# Altium PCB version2.PcbDoc
Units mm, origin at the board's own origin, x right, y up, seen from the top; angles counter-clockwise.
Board outline 190.12 x 116.2 mm, 2 copper layers (Top Layer, Bottom Layer); 69 components, 36 nets, 150 pads, 1 vias.
Unrouted connection lines stored in the file: 1.
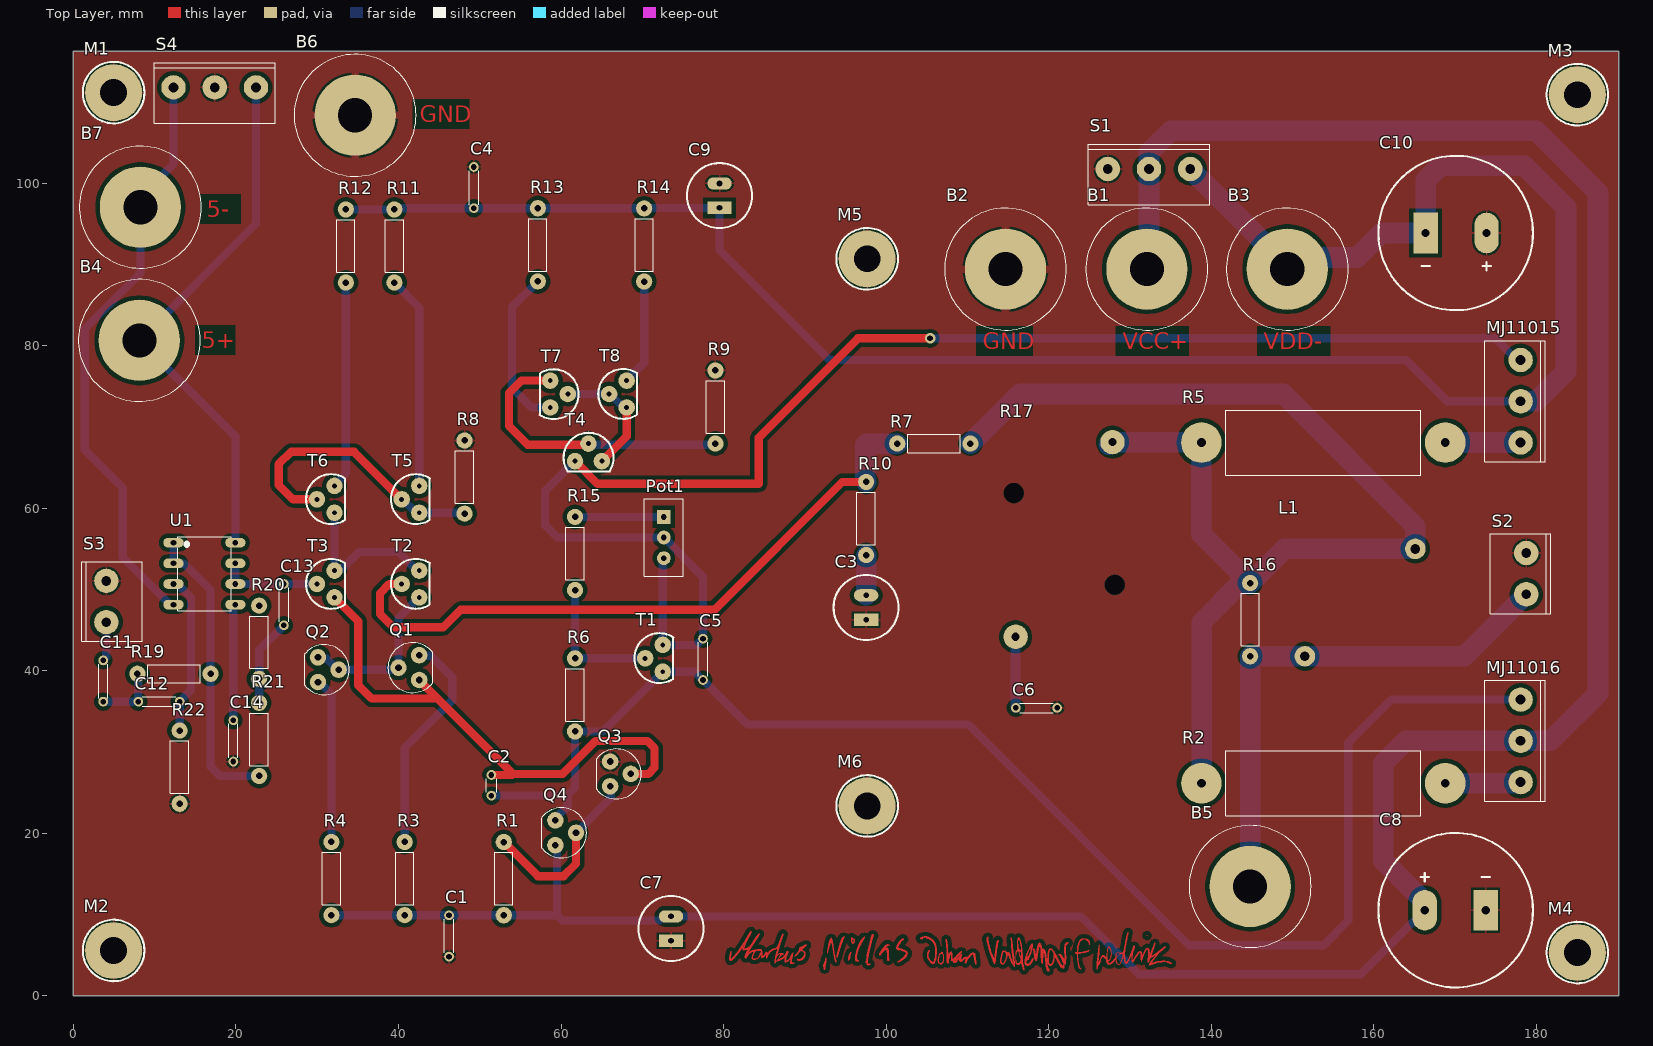
[diagram p0: Top Layer view]
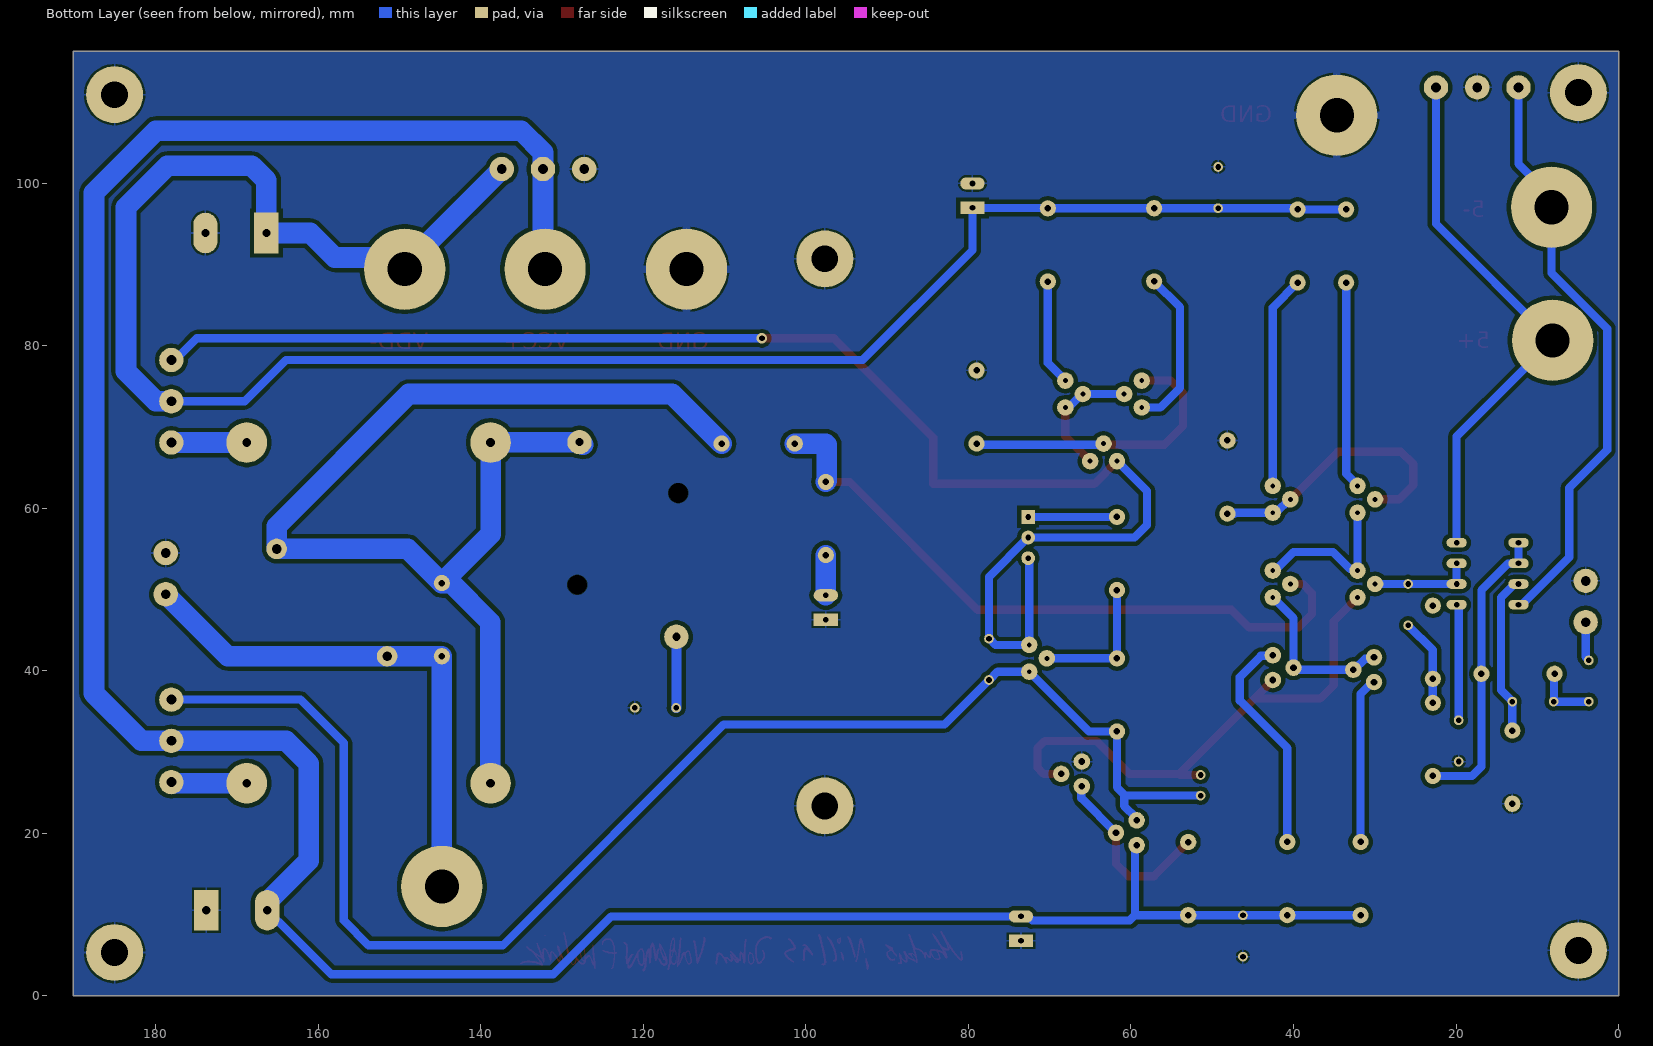
[diagram p1: Bottom Layer view, seen from below]
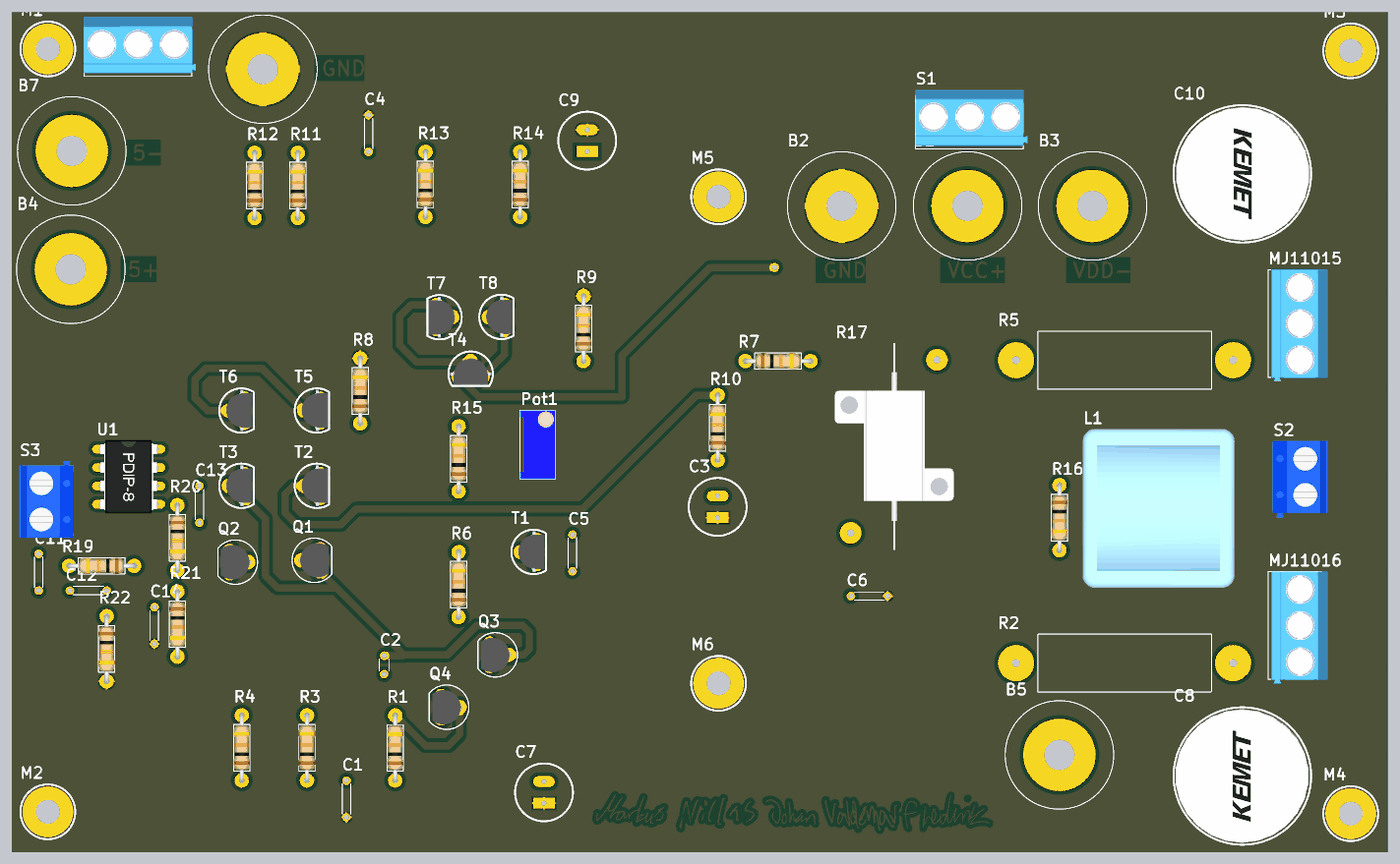
[diagram p2: 3D render of the assembled board from above, using the file's embedded part models]

## Layer stack, top to bottom
Top Solder: solder mask 0.0102, Solder Resist, Dk 3.5
Top Layer: signal copper 0.0356
Dielectric 1: dielectric 0.32, FR-4, Dk 4.8
Bottom Layer: signal copper 0.0356
Bottom Solder: solder mask 0.0102, Solder Resist, Dk 3.5

## Board outline
0,0 190.119,0 190.119,116.205 0,116.205

## Design rules (kind name [scope] priority, off if disabled: settings)
Clearance [All] p1: gap=0.508 ignorepadtopadclearanceinfootprint=TRUE except(0: Arc-Hole Track-Hole SMDPad-Hole THPad-Hole Via-Hole Fill-Hole Poly-Hole Region-Hole Text-Hole; 0.254: Arc-THPad Track-THPad SMDPad-THPad THPad-THPad)
PolygonConnect [All] p1: connectstyle=Relief reliefconductorwidth=0.254 reliefentries=4 polygonreliefangle="90 Angle" airgapwidth=0.254
RoutingVias [All] p1: holewidth=0.711 width=1.27 viastyle="Through Hole" minholewidth=0.711 minwidth=1.27 maxholewidth=0.711 maxwidth=1.27
SolderMaskExpansion [All] p1: expansion=0.102 istentingtop=FALSE
Width [All] p1: maxlimit=2.54 minlimit=1.016 preferedwidth=1.016 minimp=50.000000 maximp=50.000000 favimp=50.000000
30 further rules are at their usual default settings.

## Components (designator, comment, footprint, x,y, rotation, side; value= is the part's Value field where it differs from the comment)
B1 "Banana Plug" "Banana Plug On top" 132.08,89.408 r0 top
B2 "Banana Plug" "Banana Plug On top" 114.681,89.408 r0 top
B3 "Banana Plug" "Banana Plug On top" 149.352,89.408 r0 top
B4 "Banana Plug" "Banana Plug On top" 8.128,80.645 r0 top
B5 "Banana Plug" "Banana Plug On top" 144.78,13.462 r0 top
B6 "Banana Plug" "Banana Plug On top" 34.671,108.331 r0 top
B7 "Banana Plug" "Banana Plug On top" 8.255,97.028 r0 top
C1 "Cap" Cap-1 46.228,4.826 r90 top
C2 "Cap" Cap-0 51.435,27.178 r270 top
C3 "Cap" "Cap Ø8" 97.536,46.276 r90 top
C4 "Cap" Cap-1 49.276,96.901 r90 top
C5 "Cap" Cap-1 77.47,43.942 r270 top
C6 "Cap" Cap-1 121.031,35.433 r180 top
C7 "Cap" "Cap Ø8" 73.533,6.779 r90 top
C8 "Cap" "Cap Lyt Ø18" 166.263,10.541 r0 top
C9 "Cap" "Cap Ø8" 79.502,96.949 r90 top
C10 "Cap" "Cap Lyt Ø18" 173.863,93.853 r180 top
C11 "Cap" Cap-1 3.683,36.195 r90 top
C12 "Cap" Cap-1 13.081,36.195 r180 top
C13 "Cap" Cap-1 25.908,50.673 r270 top
C14 "Cap" Cap-1 19.685,33.909 r270 top
L1 "5 uH Homemade" "homecooked inductor" 158.369,48.387 r0 top
M1 "Screw Hole" "M3 Hole" 4.953,111.125 r0 top
M2 "Screw Hole" "M3 Hole" 4.953,5.588 r0 top
M3 "Screw Hole" "M3 Hole" 185.039,110.871 r0 top
M4 "Screw Hole" "M3 Hole" 185.039,5.334 r0 top
M5 "Screw Hole" "M3 Hole" 97.663,90.678 r0 top
M6 "Screw Hole" "M3 Hole" 97.663,23.368 r0 top
MJ11015 "Screw 3" Screw-3 178.054,68.077 r90 top
MJ11016 "Screw 3" Screw-3 178.054,26.299 r90 top
Pot1 "Pot Trim" "Pot trim slim high" 72.644,56.388 r270 top
Q1 "BC557" SOT54A 41.783,40.386 r90 top
Q2 "BC557" SOT54A 30.862,40.132 r270 top
Q3 "BC557" SOT54A 66.802,27.305 r270 top
Q4 "BC557" SOT54A 60.071,20.066 r270 top
R1 "Resistor" "RES THT 9mm" 52.959,18.923 r270 top
R2 "Resistor" "RES THT 30mm" 138.783,26.162 r0 top
R3 "Resistor" "RES THT 9mm" 40.767,18.933 r270 top
R4 "Resistor" "RES THT 9mm" 31.75,18.933 r270 top
R5 "Resistor" "RES THT 30mm" 168.783,68.072 r180 top
R6 "Resistor" "RES THT 9mm" 61.722,41.529 r270 top
R7 "Resistor" "RES THT 9mm" 110.363,67.945 r180 top
R8 "Resistor" "RES THT 9mm" 48.133,68.326 r270 top
R9 "Resistor" "RES THT 9mm" 78.994,76.945 r270 top
R10 "Resistor" "RES THT 9mm" 97.536,63.229 r270 top
R11 "Resistor" "RES THT 9mm" 39.497,96.757 r270 top
R12 "Resistor" "RES THT 9mm" 33.528,96.757 r270 top
R13 "Resistor" "RES THT 9mm" 57.15,96.901 r270 top
R14 "Resistor" "RES THT 9mm" 70.231,96.884 r270 top
R15 "Resistor" "RES THT 9mm" 61.722,58.928 r270 top
R16 "Resistor" "RES THT 9mm" 144.78,41.783 r90 top
R17 "Resistor" "Power RES 5 watt" 121.547,56.099 r90 top
R19 "Resistor" "RES THT 9mm" 7.891,39.624 r0 top
R20 "Resistor" "RES THT 9mm" 22.86,39.006 r90 top
R21 "Resistor" "RES THT 9mm" 22.86,27.051 r90 top
R22 "Resistor" "RES THT 9mm" 13.081,23.639 r90 top
S1 "Screw 3" Screw-3 137.414,101.727 r180 top
S2 "Screw 2" Screw-2 178.754,49.408 r90 top
S3 "Screw 2" Screw-2 4.064,51.054 r270 top
S4 "Screw 3" Screw-3 22.474,111.76 r180 top
T1 "BC547" TO92 72.136,40.259 r90 top
T2 "BC547" TO92 42.176,49.403 r90 top
T3 "BC547" TO92 31.75,49.403 r90 top
T4 "BC547" TO92 62.103,66.167 r0 top
T5 "BC547" TO92 42.176,59.817 r90 top
T6 "BC547" TO92 31.75,59.817 r90 top
T7 "BC547" TO92 59.055,75.311 r270 top
T8 "BC547" TO92 67.691,72.771 r90 top
U1 "TLC272" DIP-8 12.319,55.753 r270 top

## Footprints (in the part's own frame and the unit in brackets; to place one, negate y for a bottom-side part, rotate by r counter-clockwise, add the part's x,y. Pads: shape width x height; smd on the part's side, far side on the other; paste and mask are expansions set on the pad)
"Banana Plug On top" [mm] "Banana Plug"
  round 10 hole 4.2: 1(0,0)
  silkscreen extent -7.5,-7.5 7.5,7.5
"Cap Lyt Ø18" [mm] "Capacitor"
  oval 3x5 hole 1: 1(0,0)
  rect 3x5 hole 1: 2(7.5,0)
  silkscreen extent -5.7,-9.5 13.3,9.5, body extent -5.5,-9.25 13,9.25, height 38
"Cap Ø8" [mm] "Capacitor"
  rect 1.5x3 hole 0.7: 1(0,0)
  oval 1.5x3 hole 0.7: 2(3,0)
  silkscreen extent -2.5,-4 5.5,4
Cap-0 [mm] "Capacitor with no space"
  round 1.2 hole 0.7: 1(0,0) 2(2.54,0)
  silkscreen extent 0.45,-0.65 2.1,0.65
Cap-1 [mm] "Capacitor with 1 space"
  round 1.2 hole 0.7: 1(0,0) 2(5.08,0)
  silkscreen extent 0.45,-0.58 4.62,0.58
DIP-8 [mm] "Dual Inline Package with 8 Leads"
  oval 1.2x2.5 hole 0.7: 1(0,0) 2(2.54,0) 3(5.08,0) 4(7.62,0) 5(7.62,7.62) 6(5.08,7.62) 7(2.54,7.62) 8(0,7.62)
  silkscreen extent -0.75,0.53 8.35,7.13, body extent -1.28,-0.13 8.88,7.74, height 5.31
"homecooked inductor" [mil]
  round 100 hole 47.24: 1(265,260) 2(-270,-260)
  body extent -409,-465 418,401, height 625
"M3 Hole" [mm]
  round 7 hole 3.3 mask+0: 1(0,0)
  silkscreen extent -3.78,-3.78 3.79,3.78
"Pot trim slim high" [mm]
  rect 1.7x1.7 hole 0.71: 1(-2.54,0)
  round 1.7 hole 0.71: 2(0,0) 3(2.54,0)
  silkscreen extent -4.76,-2.41 4.76,2.42, body extent -4.76,-2.41 4.76,2.42, height 11.55
"Power RES 5 watt" [mm]
  round 3 hole 1: 1(-11.925,5.625) 2(12.025,-6.3)
  round 0 hole 2.45: case1(-5.525,-6.575) case2(5.75,5.85)
  body extent -14.25,-8.6 14.33,7.81, height 8.13
"RES THT 9mm" [mm]
  round 2 hole 0.8: 1(0,0) 2(9,0)
  silkscreen extent 1.28,-1.12 7.73,1.12, body extent -0.32,-1.13 9.28,1.14, height 2.36
"RES THT 30mm" [mm] "Typically power resistor"
  round 5 hole 1.1: 1(0,0) 2(30,0)
  silkscreen extent 3,-4 27,4
Screw-2 [mm] "Screw Terminal with 2 connections"
  round 3 hole 1.2: 1(0,0) 2(5.075,0)
  silkscreen extent -2.37,-3.03 7.45,4.43, body extent -3.07,-3.1 7.53,4.5, height 10
Screw-3 [mm] "Screw Terminal with 3 connections"
  round 3 hole 1.2: 1(0,0) 2(5.075,0) 3(10.15,0)
  silkscreen extent -2.37,-3.03 12.52,4.43, body extent -2.95,-3.8 12.55,4, height 10.3
SOT54A [mil]
  round 80 hole 32: B(0,70) C(-60,-30) E(60,-30)
  silkscreen extent -121,-96 121,121, body extent -94,-77 95,77, height 305
TO92 [mil]
  round 80 hole 24: 1(-15,-15) 2(50,70) 3(115,-15)
  silkscreen extent -70,-66 172,122, body extent -60,-58 163,85, height 345

## Part data
C1 C4: library part "Capacitor 1 space", Capacity=2,2nF
C2: library part "Capacitor 0 space", Capacity=220pF
C3 C7 C9: library part "Capacitor unpolarized", Capacity=100uF
C5: library part "Capacitor 1 space", Capacity=470nF
C6 C14: library part "Capacitor 1 space", Capacity=100nF
C8 C10: library part "Capacitor electrolytic", Capacity=4.7mF
C11 C12: library part "Capacitor 1 space", Capacity=22nF
C13: library part "Capacitor 1 space", Capacity=200nF
L1: library part "homemade inductor"
Pot1: "Potentiometer", Resistance=1k
Q1 Q2 Q3 Q4: "Bipolar (BJT) Transistor PNP 45 V 100 mA 320MHz 625 mW Through Hole TO-92 (TO-226)", Package="E-PKG AXIAL-LEADED-2 ON Semiconductor", Availability="In Stock", Check_prices=https://www.snapeda.com/parts/BC557/Onsemi/view-part/?ref=eda, MF=ON, MP=BC557, Price=None, SnapEDA_Link=https://www.snapeda.com/parts/BC557/Onsemi/view-part/?ref=snap
T1 T2 T3 T4 T5 T6 T7 T8: "Trans GP BJT NPN 45V 0.1A 500mW 3-Pin TO-92 T/R", Package=None, Check_prices=https://www.snapeda.com/parts/BC547/Onsemi/view-part/?ref=eda, MF="ON Semiconductor", MP=BC547, SnapEDA_Link=https://www.snapeda.com/parts/BC547/Onsemi/view-part/?ref=snap
U1: "PRECISION DUAL OPERATIONAL AMPLIFIER"
R1 R10: Ohm=1k
R2 R5: Ohm=0.4
R3 R4: Ohm=100
R6: Ohm=1K
R7: Ohm=13.82k
R8: Ohm=2k
R9: Ohm=3k
R11 R12: Ohm=5k
R13 R14: Ohm=200
R15: Ohm=220
R16 R17: Ohm=10
R19: Ohm=255k
R20 R21: Ohm=56
R22: Ohm=511k

## Via types
v1: diameter 1.27, hole 0.711, Top Layer to Bottom Layer, 1 vias

## Nets (pads, with @x,y where several pads share a name; then routed paths per layer and width w, separated by ;. In a path a pad name is that pad's centre, name@x,y a point inside that pad or via, vN(x,y) a via of type N, cw(c..) or ccw(c..) an arc to the next point about the centre after c; other vN are vias at no path point)
+5: B4.1 S4.1 U1.8 | length 66.8
  Bottom Layer w1.016: U1.8 19.939,68.834 B4.1 22.474,94.991 S4.1
-5: B7.1 S4.3 U1.4 | length 72.9
  Bottom Layer w1.016: U1.4 11.919,48.133 6.096,53.956 6.096,62.484 1.421,67.159 1.421,82.087 8.255,88.921 B7.1 8.255,98.298 12.324,102.367 S4.3
AB_out: B5.1 L1.2 R16.1 S2.1 | length 65.5
  Bottom Layer w2.54: B5.1 R16.1 L1.2 171.129,41.783 S2.1
DIFF_fb: R7.2 R10.1 T2.2 | length 82.4
  Top Layer w1.016: T2.2@40.525,50.673 38.862,50.673 37.719,49.53 37.719,46.99 39.37,45.339 45.466,45.339 47.625,47.498 78.867,47.498 94.598,63.229 R10.1
  Bottom Layer w1.016: 97.409,67.818 97.536,67.945
  Bottom Layer w2.54: 97.409,67.818 97.409,63.356 R10.1 ; 97.536,67.945 R7.2
GND: B2.1 B6.1 C1.1 C3.1 C4.2 C6.1 C7.1 C8.2 C9.2 C10.1 C14.2 M1.1 M2.1 M3.1 M4.1 M5.1 M6.1 Q3.C R8.1 R9.1 R22.1 S1.3 S2.2 S3.1 S4.2
NetC3_2: C3.2 R10.2 | length 5
  Bottom Layer w2.54: C3.2 R10.2
NetC6_2: C6.2 R17.1 | length 8.8
  Bottom Layer w1.27: R17.1 115.922,35.462 C6.2
NetC11_1: C11.1 C12.2 R19.1 | length 7.8
  Bottom Layer w1.016: C11.1 C12.2 7.966,36.23 7.966,39.549 R19.1
NetC11_2: C11.2 S3.2 | length 4.9
  Bottom Layer w1.016: C11.2 3.683,41.325 4.064,41.706 S3.2
NetC12_1: C12.1 R22.2 U1.3 | length 19.9
  Bottom Layer w1.016: U1.3 12.919,50.673 13.004,50.588 13.004,50.496 14.478,49.022 14.478,37.642 13.081,36.245 C12.1 R22.2
NetC13_1: C13.1 T3.2 U1.6 U1.7 | length 12.6
  Bottom Layer w1.016: U1.7 U1.6 C13.1 T3.2
NetC13_2: C13.2 R20.1 R21.2 | length 10.8
  Bottom Layer w1.016: R21.2 R20.1 22.86,42.545 C13.2
NetC14_1: C14.1 R20.2 U1.5 | length 14.3
  Bottom Layer w1.016: C14.1 19.685,47.829 19.939,48.083 U1.5
NetL1_1: L1.1 R2.1 R5.2 R7.1 R16.2 R17.2 | length 147.9
  Bottom Layer w2.54: R7.1 116.459,74.041 148.844,74.041 165.1,57.785 L1.1 148.988,54.991 R16.2 ; R17.2@127.417,67.818 127.723,68.124 R17.2 127.873,68.098 138.757,68.098 R5.2 138.783,56.78 R16.2 ; R2.1 138.811,26.19 138.811,45.974 143.62,50.783 R16.2
NetMJ11015_1: MJ11015.1 R5.1 | length 9.3
  Bottom Layer w2.54: R5.1 MJ11015.1@178.049,68.072
NetMJ11016_1: MJ11016.1 R2.2 | length 9.3
  Bottom Layer w2.54: R2.2 177.917,26.162 MJ11016.1
NetPot1_1: Pot1.1 R15.1 | length 10.9
  Bottom Layer w1.016: R15.1 Pot1.1
NetQ1_B: Q1.B Q2.B Q2.C T2.1 | length 20.2
  Bottom Layer w1.016: Q2.C@30.227,41.529 30.286,41.471 31.219,41.471 32.558,40.132 Q2.B 39.669,40.132 39.923,40.386 Q1.B 40.005,46.47 T2.1
NetQ1_E: Q1.E R3.1 | length 27.9
  Bottom Layer w1.016: R3.1 40.767,30.48 46.609,36.322 46.609,39.243 44.024,41.828 42.627,41.828 Q1.E
NetQ2_E: Q2.E R4.1 | length 20.4
  Bottom Layer w1.016: Q2.E@30.227,38.735 30.227,38.691 31.75,37.168 R4.1
NetQ3_E: Q3.E Q4.B R1.1 | length 22.7
  Top Layer w1.016: R1.1 57.15,14.732 60.325,14.732 61.849,16.256 Q4.B
  Bottom Layer w1.016: Q4.B 66.109,24.326 66.109,25.85 Q3.E@66.167,25.908
NetR6_1: R6.1 R15.2 T1.2 | length 17.2
  Bottom Layer w1.016: R15.2 R6.1 T1.2@70.485,41.529
NetR8_2: R8.2 T5.1 T5.2 T6.2 | length 33.7
  Top Layer w1.016: T6.2 27.051,61.087 25.273,62.865 25.273,65.405 26.797,66.929 34.556,66.929 T5.2
  Bottom Layer w1.016: T5.2@40.525,61.087 42.103,59.509 42.484,59.509 T5.1 47.184,59.436 47.294,59.326 R8.2@47.371,59.326
NetR9_2: R9.2 T4.2 T7.1 | length 36.2
  Top Layer w1.016: T7.1 55.118,75.692 53.594,74.168 53.594,70.104 55.88,67.818 T4.2@63.373,67.818
  Bottom Layer w1.016: T4.2@63.373,67.818 78.79,67.818 78.917,67.945 R9.2
NetR11_2: R11.2 T5.3 | length 26.4
  Bottom Layer w1.016: R11.2@39.497,87.68 R11.2 42.557,84.697 T5.3
NetR12_2: R12.2 T6.3 | length 25.6
  Bottom Layer w1.016: T6.3 32.131,62.841 33.528,64.238 R12.2
NetR13_2: R13.2 T7.3 | length 20.1
  Bottom Layer w1.016: R13.2 53.975,84.726 53.975,74.803 56.388,72.39 T7.3
NetR14_2: R14.2 T8.3 | length 13.1
  Bottom Layer w1.016: T8.3 70.231,77.851 R14.2
NetR19_2: R19.2 R21.1 U1.1 U1.2 | length 36.6
  Bottom Layer w1.016: U1.1 U1.2 12.354,53.178 13.624,53.178 16.891,49.911 R19.2 16.891,28.194 18.034,27.051 R21.1
NetT2_3: T2.3 T3.3 T6.1 | length 19.4
  Bottom Layer w1.016: T6.1 32.131,52.705 T3.3 32.325,52.518 33.044,52.518 35.135,54.61 39.996,54.61 42.282,52.324 T2.3
NetT4_3: T4.3 T7.2 T8.1 T8.2 | length 15.9
  Top Layer w1.016: T4.3 68.072,68.834 T8.1
  Bottom Layer w1.016: T7.2@60.706,74.041 66.04,74.041 67.618,72.463 67.999,72.463 T8.1
OPS_npn_b: C2.2 C5.2 MJ11016.3 Q4.C R6.2 T1.1 | length 180
  Bottom Layer w1.016: C2.2 60.706,24.638 60.833,24.765 ; Q4.C 59.309,21.865 60.833,23.389 60.833,24.765 ; MJ11016.3 162.179,36.449 156.845,31.115 156.845,9.271 153.797,6.223 137.287,6.223 110.109,33.401 82.931,33.401 C5.2 77.42,38.862 76.404,39.878 T1.1 65.168,32.529 R6.2 61.722,25.654 60.833,24.765
OPS_pnp_b: C5.1 MJ11015.3 Pot1.2 Pot1.3 T1.3 T4.1 | length 184.4
  Top Layer w1.016: T4.1 64.516,62.992 84.328,62.992 84.328,68.707 96.52,80.899 v1(105.41,80.899)
  Bottom Layer w1.016: T4.1 58.039,62.103 58.039,57.912 59.563,56.388 Pot1.2 77.47,51.562 C5.1 77.42,43.942 76.658,43.18 T1.3 72.517,53.666 72.644,53.793 Pot1.3 ; v1(105.41,80.899) 174.943,80.899 177.615,78.227 MJ11015.3
VAS_in: C2.1 Q1.C Q3.B T3.1 | length 66.9
  Top Layer w1.016: T3.1 35.052,46.101 35.052,38.227 36.703,36.576 44.831,36.576 ; Q1.C@42.36,38.931 42.418,38.989 44.831,36.576 ; C2.1 53.975,27.178 54.102,27.305 ; Q3.B 70.739,27.305 71.501,28.067 71.501,30.48 70.612,31.369 64.262,31.369 60.198,27.305 54.102,27.305 ; 44.831,36.576 54.102,27.305
VCC: B1.1 C1.2 C7.2 C8.1 MJ11016.2 Q4.E R1.2 R3.2 R4.2 S1.2 | length 335.9
  Bottom Layer w1.016: R4.2 R3.2 40.781,9.92 46.214,9.92 C1.2 46.237,9.915 52.951,9.915 R1.2 59.436,9.923 ; Q4.E 59.503,18.348 59.503,10.056 59.436,9.988 60.153,9.271 72.144,9.271 72.652,9.779 C7.2 123.952,9.779 131.064,2.667 158.389,2.667 164.883,9.161 165.347,9.161 166.263,10.078 C8.1
  Bottom Layer w2.54: B1.1 132.339,89.667 132.339,103.764 135.001,106.426 179.959,106.426 187.579,98.806 187.579,37.211 181.742,31.374 163.962,31.374 161.163,28.575 161.163,16.641 166.263,11.541 C8.1
VDD: B3.1 C4.1 C9.1 C10.2 MJ11015.2 R11.1 R12.1 R13.1 R14.1 S1.1 | length 247.5
  Bottom Layer w1.016: R12.1 R11.1 39.574,96.757 39.718,96.901 C4.1 R13.1 57.159,96.892 70.223,96.892 R14.1 70.263,96.916 79.469,96.916 C9.1 79.502,91.73 93,78.232 163.957,78.232 169.037,73.152 MJ11015.2
  Bottom Layer w2.54: S1.1 149.352,89.789 B3.1 150.779,90.835 157.957,90.835 160.974,93.853 C10.2 166.363,100.323 168.148,102.108 178.562,102.108 183.642,97.028 183.642,76.835 179.959,73.152 MJ11015.2
pads on no net: R17.case1 R17.case2

## Polygon pours and split planes (outlines as drawn)
GND on Bottom Layer "GND_L02_P000" (solid, pour order 0): 189.992,116.205 189.992,0 0,0 0,116.205
GND on Top Layer "GND_L01_P001" (solid, pour order 1): 0,116.205 189.992,116.205 189.992,0 0,0

## Other copper
Top Layer:
  drawing of 25 lines, arcs and shapes, not listed
  text "GND" at 42.591,107.488 h2
  text "5-" at 16.429,95.804 h2
  text "5+" at 15.794,79.675 h2
  text "GND" at 111.887,79.548 h2
  text "VCC+" at 129.078,79.548 h2
  text "VDD-" at 146.477,79.548 h2